# Allegro board basemon_mod_V1.brd

No outline. copper layers: TOP, VTT, GND, VCC, BOTTOM. Coordinates in mm from the lowest, leftmost part position.

## Placement (name value [footprint] x y rotation side)
C1  1.0UF  [CAP805]  0 17.78 180 bottom
C2  1.0UF  [CAP805]  40.64 17.78 180 bottom
C3  1.0UF  [CAP805]  40.64 7.62 180 bottom
C4  1.0UF  [CAP805]  0 12.7 180 bottom
C5  1.0UF  [CAP805]  0 7.62 180 bottom
C6  1.0UF  [CAP805]  40.64 12.7 180 bottom
U1  -  [CONN10]  15.24 20.32 0 top
U2  ***  [SOIC14]  10.16 10.16 0 top
U3  ***  [SOIC14]  30.48 10.16 0 top
U4  ***  [SOIC8]  20.32 10.16 0 top
U5  -  [CONN10]  25.4 0 180 top

## Library data of the parts
C1-C6 = CSMD0805: part number: CSMD0805-1.0UF,10%,0805,25V
U1 U5 = IDS_C10: User Part Number: ***
U2 U3 = OPA4277
U4 = OPA2277

## Footprints (pads in the part's own frame, mm; a bottom-side part is the same pattern mirrored in y, then rotated)
CAP805
  rect 1.372x1.27 smd: 1(0,1) 2(0,-1)
CONN10
  round 1.524 hole 0.914: 1(0,0) 2(0,2.54) 3(2.54,0) 4(2.54,2.54) 5(5.08,0) 6(5.08,2.54) 7(7.62,0) 8(7.62,2.54) 9(10.16,0) 10(10.16,2.54)
SOIC8
  rect 1.27x0.635 smd: 1(-2.477,1.905) 2(-2.477,0.635) 3(-2.477,-0.635) 4(-2.477,-1.905) 5(2.477,-1.905) 6(2.477,-0.635) 7(2.477,0.635) 8(2.477,1.905)
SOIC14
  rect 1.27x0.635 smd: 1(-2.477,3.81) 2(-2.477,2.54) 3(-2.477,1.27) 4(-2.477,0) 5(-2.477,-1.27) 6(-2.477,-2.54) 7(-2.477,-3.81) 8(2.477,-3.81) 9(2.477,-2.54) 10(2.477,-1.27) 11(2.477,0) 12(2.477,1.27) 13(2.477,2.54) 14(2.477,3.81)

## Nets
VCC: C2.2(B<0>) C5.2(B<0>) C6.2(B<0>)
VCC5M: C1.2(B<0>) C3.2(B<0>) C4.2(B<0>)
UNNAMED_1_CSMD0805_I6_A: C5.1(A<0>) U2.4(V+)
UNNAMED_1_CSMD0805_I7_A: C1.1(A<0>) U2.11(V-)
UNNAMED_1_CSMD0805_I8_A: C2.1(A<0>) U3.4(V+)
UNNAMED_1_CSMD0805_I9_A: C3.1(A<0>) U3.11(V-)
UNNAMED_1_CSMD0805_I10_A: C6.1(A<0>) U4.8(V+)
UNNAMED_1_CSMD0805_I11_A: C4.1(A<0>) U4.4(V-)
UNNAMED_1_IDSC10_I1_PIN1: U1.1(PIN1) U2.3(+IN_A)
UNNAMED_1_IDSC10_I1_PIN2: U1.2(PIN2) U2.5(+IN_B)
UNNAMED_1_IDSC10_I1_PIN3: U1.3(PIN3) U2.10(+IN_C)
UNNAMED_1_IDSC10_I1_PIN4: U1.4(PIN4) U2.12(+IN_D)
UNNAMED_1_IDSC10_I1_PIN5: U1.5(PIN5) U4.5(+IN_B)
UNNAMED_1_IDSC10_I1_PIN6: U1.6(PIN6) U3.3(+IN_A)
UNNAMED_1_IDSC10_I1_PIN7: U1.7(PIN7) U3.5(+IN_B)
UNNAMED_1_IDSC10_I1_PIN8: U1.8(PIN8) U3.10(+IN_C)
UNNAMED_1_IDSC10_I1_PIN9: U1.9(PIN9) U3.12(+IN_D)
UNNAMED_1_IDSC10_I1_PIN10: U1.10(PIN10) U4.3(+IN_A)
UNNAMED_1_IDSC10_I2_PIN1: U2.1(OUT_A) U2.2(-IN_A) U5.1(PIN1)
UNNAMED_1_IDSC10_I2_PIN2: U2.6(-IN_B) U2.7(OUT_B) U5.2(PIN2)
UNNAMED_1_IDSC10_I2_PIN3: U2.8(OUT_C) U2.9(-IN_C) U5.3(PIN3)
UNNAMED_1_IDSC10_I2_PIN4: U2.13(-IN_D) U2.14(OUT_D) U5.4(PIN4)
UNNAMED_1_IDSC10_I2_PIN5: U4.6(-IN_B) U4.7(OUT_B) U5.5(PIN5)
UNNAMED_1_IDSC10_I2_PIN6: U3.1(OUT_A) U3.2(-IN_A) U3.6(-IN_B) U5.6(PIN6)
UNNAMED_1_IDSC10_I2_PIN7: U3.7(OUT_B) U5.7(PIN7)
UNNAMED_1_IDSC10_I2_PIN8: U3.8(OUT_C) U3.9(-IN_C) U5.8(PIN8)
UNNAMED_1_IDSC10_I2_PIN9: U3.13(-IN_D) U3.14(OUT_D) U5.9(PIN9)
UNNAMED_1_IDSC10_I2_PIN10: U4.1(OUT_A) U4.2(-IN_A) U5.10(PIN10)
